# EAGLE board avr_v2 (EAGLE 5.06)
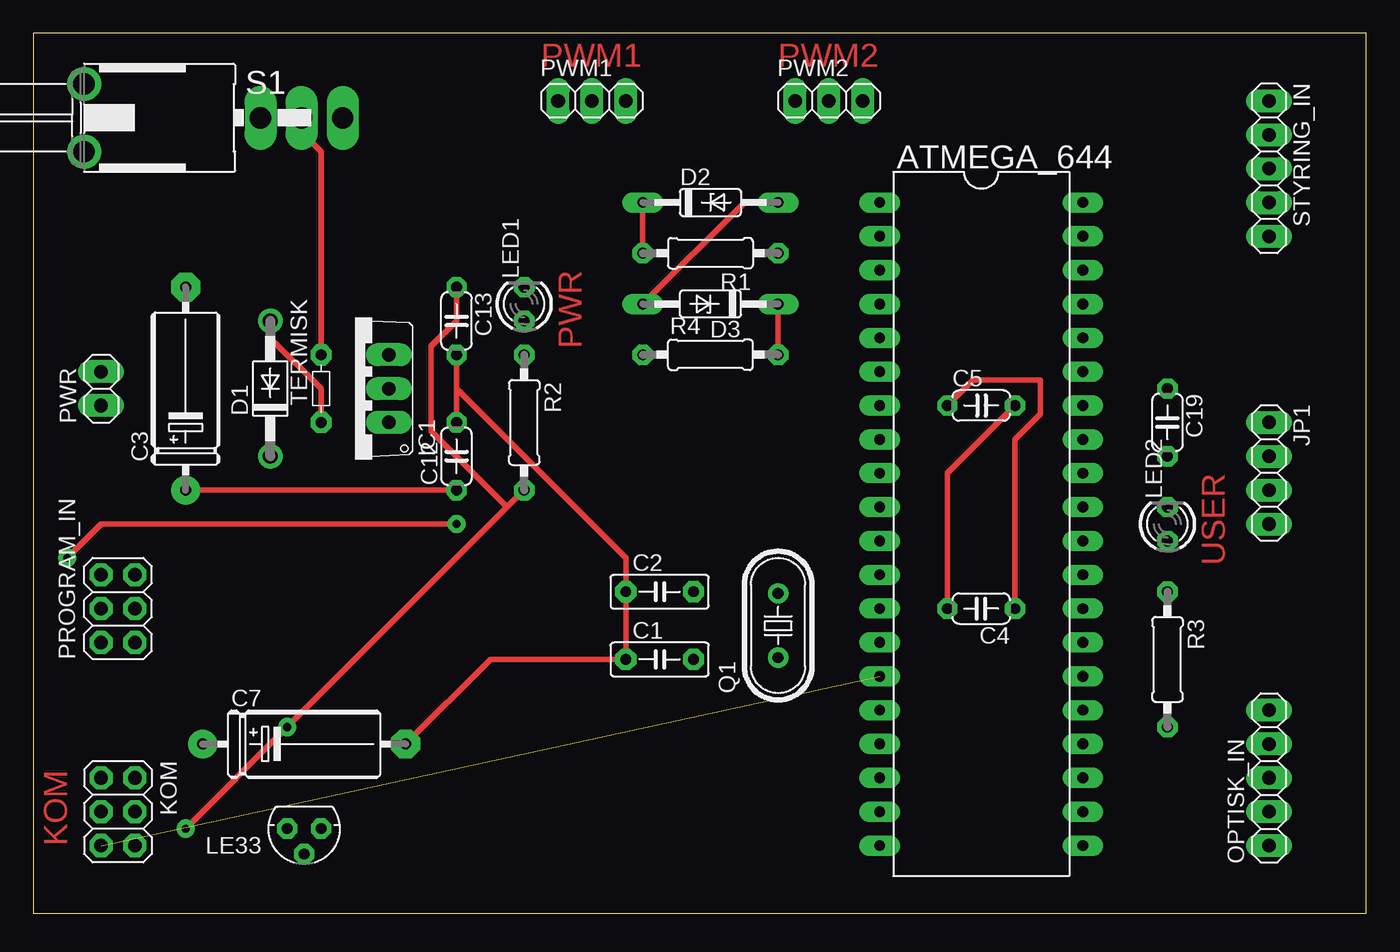
[diagram p0: board, top side]
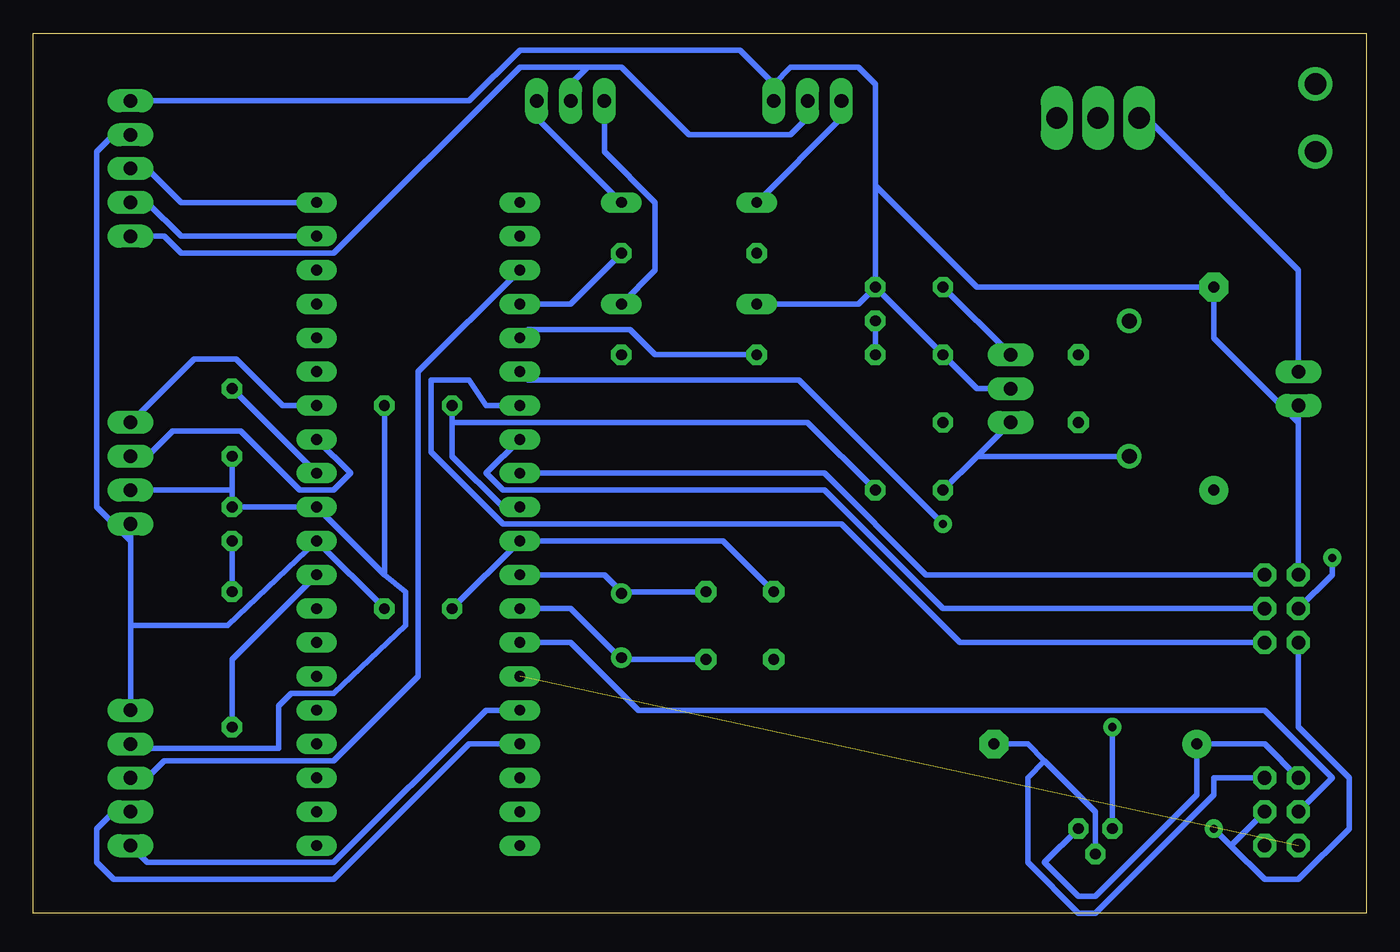
[diagram p1: board, bottom side, seen from below]

Size 100 x 66.03 mm. Coordinates in mm from the lower left corner, seen from the top.
Outline: 0,0 100,0 100,66.03 0,66.03 0,0
Copper layers (1*16): Top 0.035mm / dielectric 1.5mm / Bottom 0.035mm
Design rules "default *": minimum track width 16mil, minimum drill 24mil, track to track 10mil, track to pad 10mil, pad to pad 10mil, via to via 10mil, smd to smd 8mil, copper to edge 40mil, drill to drill 8mil, minimum pad ring 14mil, minimum via ring 15mil, stop-mask expansion 4mil, vias tented up to drill 0mil, thermal gap 10mil
tRestrict: area 3.8,19 to 8.9,26.7; area 54.6,17.8 to 57.1,25.4; area 25.4,35.6 to 27.9,43.2; area 3.8,36.8 to 6.3,41.9; area 35.6,43.2 to 38.1,48.3; area 83.8,26.7 to 86.4,31.8; area 62.2,3.8 to 64.8,54.6; area 77.5,3.8 to 80,54.6; area 3.8,3.8 to 8.9,11.4; area 17.8,3.8 to 22.9,7.6; area 91.4,3.8 to 94,16.5; area 38.1,59.7 to 45.7,62.2; 3 more areas

## Footprints (pad centres in the part's own frame; a part is rotated, then mirrored left to right if it is on the bottom)
DIL40 = drill 0.813 long: 1 -24.13,-7.62; 2 -21.59,-7.62; 3 -19.05,-7.62; 4 -16.51,-7.62; 5 -13.97,-7.62; 6 -11.43,-7.62; 7 -8.89,-7.62; 8 -6.35,-7.62; 9 -3.81,-7.62; 10 -1.27,-7.62; 11 1.27,-7.62; 12 3.81,-7.62; 13 6.35,-7.62; 14 8.89,-7.62; 15 11.43,-7.62; 16 13.97,-7.62; 17 16.51,-7.62; 18 19.05,-7.62; 19 21.59,-7.62; 20 24.13,-7.62; 21 24.13,7.62; 22 21.59,7.62; 23 19.05,7.62; 24 16.51,7.62; 25 13.97,7.62; 26 11.43,7.62; 27 8.89,7.62; 28 6.35,7.62; 29 3.81,7.62; 30 1.27,7.62; 31 -1.27,7.62; 32 -3.81,7.62; 33 -6.35,7.62; 34 -8.89,7.62; 35 -11.43,7.62; 36 -13.97,7.62; 37 -16.51,7.62; 38 -19.05,7.62; 39 -21.59,7.62; 40 -24.13,7.62
C5B2.5 = drill 0.813 pad 1.6 octagon: 1 -2.54,0; 2 2.54,0
E15-5 = drill 0.813 pad 2.159 round: + -7.62,0 | drill 0.813 pad 2.159 octagon: - 7.62,0
C050-024X044 = drill 0.813 octagon: 1 -2.54,0; 2 2.54,0
DO41-10 = drill 1.118 round: A 5.08,0; C -5.08,0
DO35Z10 = drill 0.813 long: A 5.08,0; C -5.08,0
TO220V = drill 1.016 long: 1 -2.54,-2.54; 2 0,-2.54; 3 2.54,-2.54
1X04 = drill 1.016 long: 1 -3.81,0; 2 -1.27,0; 3 1.27,0; 4 3.81,0
2X03 = drill 1.016 octagon: 1 -2.54,-1.27; 2 -2.54,1.27; 3 0,-1.27; 4 0,1.27; 5 2.54,-1.27; 6 2.54,1.27
78LXX = drill 0.813 octagon: GND 0,1.905; IN 1.27,0; OUT -1.27,0
LED3MM = drill 0.813 octagon: A -1.27,0; K 1.27,0
1X05 = drill 1.016 long: 1 -5.08,0; 2 -2.54,0; 3 0,0; 4 2.54,0; 5 5.08,0
1X03 = drill 1.016 long: 1 -2.54,0; 2 0,0; 3 2.54,0
1X02 = drill 1.016 long: 1 -1.27,0; 2 1.27,0
HC49U70 = drill 0.813 round: 1 -2.413,0; 2 2.413,0
0207/10 = drill 0.813 octagon: 1 -5.08,0; 2 5.08,0
LPV-1 = drill 1.6 long: 1 0,13.24; 2 0,16.32; 3 0,19.4 | drill 1.6 pad 2.54 round: B -2.54,0; B1 2.54,0
R-5 = drill 0.813 pad 1.6 octagon: 1 -2.54,0; 2 2.54,0

## Placement (x,y rotation side)
ATMEGA_644  MEGA164P/324P/644P-PU  [DIL40]  71.12,29.21 270 top
C1  22pF  [C5B2.5]  46.99,19.05 0 top
C2  22pF  [C5B2.5]  46.99,24.13 0 top
C3  330uF  [E15-5]  11.43,39.37 90 top
C4  100nF  [C050-024X044]  71.12,22.86 180 top
C5  100nF  [C050-024X044]  71.12,38.1 0 top
C7  4,7uF  [E15-5]  20.32,12.7 0 top
C12  100nF  [C050-024X044]  31.75,34.29 90 top
C13  100nF  [C050-024X044]  31.75,44.45 270 top
C19  100nF  [C050-024X044]  85.09,36.83 270 top
D1  1N4004  [DO41-10]  17.78,39.37 90 top
D2  [DO35Z10]  50.8,53.34 0 top
D3  [DO35Z10]  50.8,45.72 180 top
IC1  7805TV  [TO220V]  24.13,39.37 90 top
JP1  [1X04]  92.71,33.02 270 top
KOM  [2X03]  6.35,7.62 270 top
LE33  [78LXX]  20.32,6.35 180 top
LED1  [LED3MM]  36.83,45.72 90 top
LED2  [LED3MM]  85.09,29.21 90 top
OPTISK_IN  [1X05]  92.71,10.16 90 top
PROGRAM_IN  [2X03]  6.35,22.86 90 top
PWM1  [1X03]  41.91,60.96 0 top
PWM2  [1X03]  59.69,60.96 0 top
PWR  [1X02]  5.08,39.37 90 top
Q1  18.4320 MHz  [HC49U70]  55.88,21.59 90 top
R1  1k  [0207/10]  50.8,49.53 180 top
R2  1k  [0207/10]  36.83,36.83 270 top
R3  1k  [0207/10]  85.09,19.05 270 top
R4  1k  [0207/10]  50.8,41.91 0 top
S1  [LPV-1]  3.81,59.69 270 top
STYRING_IN  [1X05]  92.71,55.88 270 top
TERMISK  1A  [R-5]  21.59,39.37 90 top

## Library data of the parts
ATMEGA_644 = avr-5
C1 C2 = capacitor-wima
C3-C5 C7 C12 C13 C19 = rcl
D1-D3 = diode
IC1 = linear
JP1 KOM OPTISK_IN PROGRAM_IN PWM1 PWM2 PWR STYRING_IN = pinhead
LE33 = v-reg
LED1 LED2 = led
Q1 = crystal
R1-R4 = resistor
S1 = switch
TERMISK = discrete

## Nets
+3V3: C7.+ KOM.1 LE33.OUT
+5V: ATMEGA_644.10 ATMEGA_644.30 C4.1 C5.1 C13.1 IC1.3 JP1.4 KOM.4 LE33.IN OPTISK_IN.5 PROGRAM_IN.2 R2.2 STYRING_IN.2
INT0: ATMEGA_644.16 OPTISK_IN.1
INT1: ATMEGA_644.17 OPTISK_IN.2
INT2: ATMEGA_644.3 OPTISK_IN.3
MISO: ATMEGA_644.7 PROGRAM_IN.1
MOSI: ATMEGA_644.6 PROGRAM_IN.4
N$1: ATMEGA_644.13 C1.2 Q1.1
N$2: ATMEGA_644.12 C2.2 Q1.2
N$3: ATMEGA_644.40 STYRING_IN.3
N$4: S1.2 TERMISK.2
N$5: PWR.2 S1.1
N$6: LED1.A R2.1
N$7: ATMEGA_644.29 R3.2
N$8: LED2.A R3.1
N$9: ATMEGA_644.39 STYRING_IN.4
N$10: ATMEGA_644.32 C19.1
N$11: ATMEGA_644.34 JP1.1
N$12: ATMEGA_644.33 JP1.2
N$13: D2.C PWM1.1 R1.2
N$14: D3.C PWM2.1 R4.2
N$20: D1.A TERMISK.1
PE: ATMEGA_644.11 ATMEGA_644.31 C1.1 C2.1 C3.- C4.2 C5.2 C7.- C12.2 C13.2 C19.2 D2.A D3.A IC1.2 JP1.3 KOM.2 LE33.GND LED1.K LED2.K OPTISK_IN.4 PROGRAM_IN.6 PWM1.3 PWM2.3 PWR.1 STYRING_IN.1
PWM1: ATMEGA_644.4 R1.1
PWM2: ATMEGA_644.5 R4.1
PWR: PWM1.2 PWM2.2 STYRING_IN.5
RESET: ATMEGA_644.9 PROGRAM_IN.5
RXD0: ATMEGA_644.14 KOM.3
SCK: ATMEGA_644.8 PROGRAM_IN.3
TXD0: ATMEGA_644.15 KOM.5
VCC: C3.+ C12.1 D1.C IC1.1

## Tracks (layer width: path | path; a pad name or v marks a point on that pad's centre or on a via)
+3V3
  Bottom 0.406: KOM.1 7.62,12.7 C7.+ 12.7,8.89 20.32,1.27 21.59,1.27 24.13,3.81 LE33.OUT
+5V  (via drill 0.61)
  Top 0.406: 35.56,30.48 R2.2 | 35.56,30.48 v19.05,13.97 v11.43,6.35 | C13.1 31.75,44.45 29.84,42.55 29.84,36.2 35.56,30.48 | C4.1 73.66,35.56 75.56,37.47 75.56,40.01 70.48,40.01 C5.1
  Bottom 0.406: C4.1 ATMEGA_644.30 85.41,21.59 92.71,21.59 | 92.71,27.94 JP1.4 | 92.71,21.59 92.71,27.94 | 92.71,21.59 OPTISK_IN.5 | STYRING_IN.2 93.98,58.42 95.25,57.15 95.25,30.48 92.71,27.94 | PROGRAM_IN.2 5.08,13.97 1.27,10.16 1.27,6.35 5.08,2.54 7.62,2.54 10.16,5.08 | 10.16,5.08 KOM.4 | ATMEGA_644.10 64.77,30.48 68.58,34.29 68.58,36.83 | 68.58,36.83 C5.1 | C13.1 IC1.3 | v19.05,13.97 LE33.IN | 68.58,36.83 41.91,36.83 R2.2 | 10.16,5.08 v11.43,6.35
INT0
  Bottom 0.406: ATMEGA_644.16 66.04,15.24 77.47,3.81 91.44,3.81 OPTISK_IN.1
INT1
  Bottom 0.406: ATMEGA_644.17 67.31,12.7 77.47,2.54 93.98,2.54 95.25,3.81 95.25,6.35 93.98,7.62 OPTISK_IN.2
INT2
  Bottom 0.406: ATMEGA_644.3 71.12,40.64 71.12,17.78 77.47,11.43 90.17,11.43 91.44,10.16 OPTISK_IN.3
MISO
  Bottom 0.406: ATMEGA_644.7 66.04,38.1 67.31,40.01 70.17,40.01 70.17,34.61 64.77,29.21 39.37,29.21 30.48,20.32 PROGRAM_IN.1
MOSI  (via drill 0.61)
  Top 0.406: v31.75,29.21 5.08,29.21 v2.54,26.67
  Bottom 0.406: v2.54,26.67 2.54,25.4 PROGRAM_IN.4 | ATMEGA_644.6 62.87,40.01 42.55,40.01 v31.75,29.21
N$1
  Bottom 0.406: C1.2 55.88,19.05 | ATMEGA_644.13 59.69,22.86 55.88,19.05 | 55.88,19.05 Q1.1
N$2
  Bottom 0.406: C2.2 55.88,24.13 | ATMEGA_644.12 57.15,25.4 55.88,24.13 | 55.88,24.13 Q1.2
N$3
  Bottom 0.406: ATMEGA_644.40 88.9,53.34 91.44,55.88 STYRING_IN.3
N$4
  Top 0.406: TERMISK.2 21.59,57.15 19.05,59.69 S1.2
N$5
  Bottom 0.406: PWR.2 5.08,48.26 16.51,59.69 S1.1
N$6
  Bottom 0.406: R2.1 LED1.A
N$7
  Bottom 0.406: R3.2 85.09,19.05 ATMEGA_644.29
N$8
  Bottom 0.406: R3.1 LED2.A
N$9
  Bottom 0.406: ATMEGA_644.39 88.9,50.8 91.44,53.34 STYRING_IN.4
N$10
  Bottom 0.406: ATMEGA_644.32 C19.1
N$11
  Bottom 0.406: ATMEGA_644.34 81.28,38.1 84.77,41.59 87.95,41.59 JP1.1
N$12
  Bottom 0.406: ATMEGA_644.33 76.2,33.02 77.47,31.75 80.01,31.75 84.45,36.2 89.53,36.2 91.44,34.29 JP1.2
N$13
  Top 0.406: R1.2 D2.C
  Bottom 0.406: PWM1.1 39.37,59.69 D2.C
N$14
  Top 0.406: R4.2 D3.C
  Bottom 0.406: PWM2.1 57.15,57.15 53.34,53.34 53.34,48.26 D3.C
N$20
  Top 0.406: TERMISK.1 21.59,39.37 17.78,43.18 D1.A
PE
  Top 0.406: C5.2 68.58,33.02 C4.2 | C7.- 34.29,19.05 C1.1 C2.1 44.45,26.67 31.75,39.37 | 31.75,39.37 C13.2 | 31.75,39.37 C12.2 | D2.A 53.34,53.34 D3.A
  Bottom 0.406: C4.2 ATMEGA_644.11 48.26,27.94 C2.1 | 85.09,31.75 LED2.K ATMEGA_644.31 73.66,25.4 | 85.09,31.75 C19.2 | 73.66,25.4 72.07,24.13 72.07,21.59 77.47,16.51 80.64,16.51 81.6,15.56 81.6,12.38 92.39,12.38 OPTISK_IN.4 | 85.09,31.75 JP1.3 | 73.66,25.4 C5.2 | 24.13,11.43 20.32,7.62 LE33.GND | 24.13,11.43 25.4,12.7 C7.- | KOM.2 11.43,10.16 11.43,8.89 20.32,0 21.59,0 25.4,3.81 25.4,10.16 24.13,11.43 | 5.08,36.83 PWR.1 | PROGRAM_IN.6 5.08,36.83 | 5.08,36.83 11.43,43.18 C3.- 29.21,46.99 36.83,54.61 | D2.A 62.23,59.69 PWM2.3 | LED1.K C13.2 29.21,39.37 IC1.2 | 44.45,62.23 43.18,63.5 38.1,63.5 36.83,62.23 36.83,54.61 | 36.83,54.61 LED1.K | STYRING_IN.1 67.31,60.96 63.5,64.77 46.99,64.77 44.45,62.23 | 44.45,62.23 PWM1.3 | D3.A 38.1,45.72 LED1.K
PWM1
  Bottom 0.406: ATMEGA_644.4 59.69,45.72 R1.1
PWM2
  Bottom 0.406: R4.1 53.34,41.91 55.25,43.81 62.87,43.81 ATMEGA_644.5
PWR
  Bottom 0.406: PWM1.2 41.91,59.69 43.18,58.42 50.8,58.42 55.88,63.5 58.42,63.5 | 58.42,63.5 59.69,62.23 PWM2.2 | STYRING_IN.5 90.17,50.8 88.9,49.53 77.47,49.53 63.5,63.5 58.42,63.5
RESET
  Bottom 0.406: ATMEGA_644.9 40.64,33.02 33.02,25.4 PROGRAM_IN.5
RXD0
  Bottom 0.406: ATMEGA_644.14 59.69,20.32 54.61,15.24 7.62,15.24 2.54,10.16 KOM.3
SCK
  Bottom 0.406: ATMEGA_644.8 66.04,33.02 64.77,31.75 40.64,31.75 31.75,22.86 PROGRAM_IN.3
TXD0  (1 unrouted)
VCC
  Top 0.406: C3.+ C12.1
  Bottom 0.406: 29.21,34.29 IC1.1 | C12.1 29.21,34.29 | 29.21,34.29 D1.C

## Text on the board
Top: PWM1 | PWM2 | PWR | USER | KOM
tRestrict: STYRING | VCC | GND | ACCEL | PROG | OPTISK